# EAGLE board motorshieldv3_jd (EAGLE 5.06)
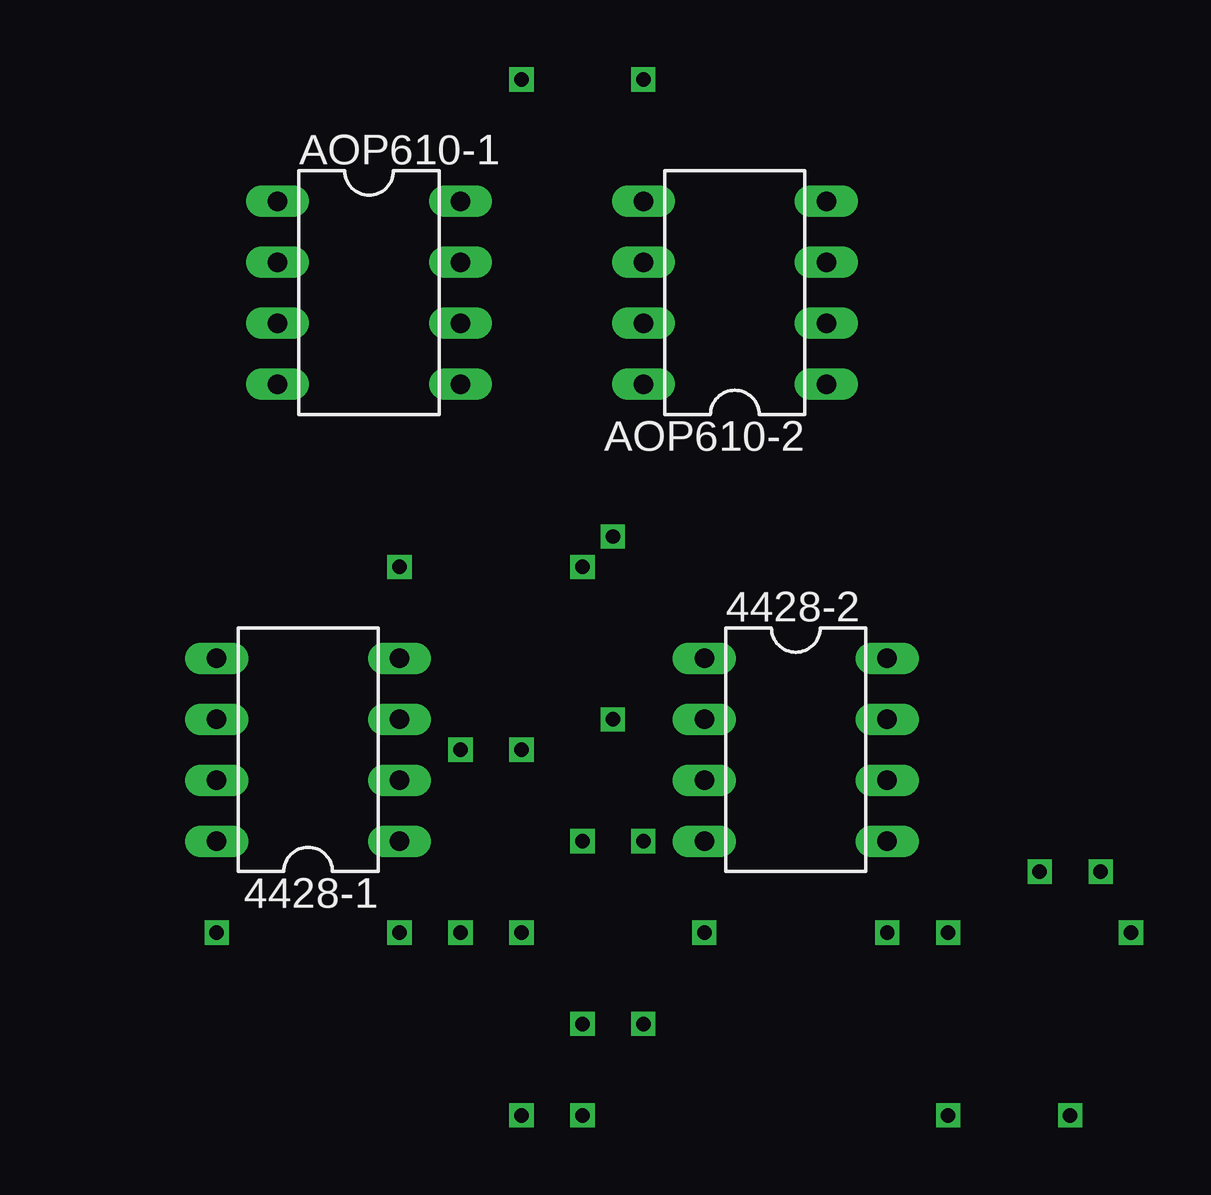
[diagram p0: board, top side]
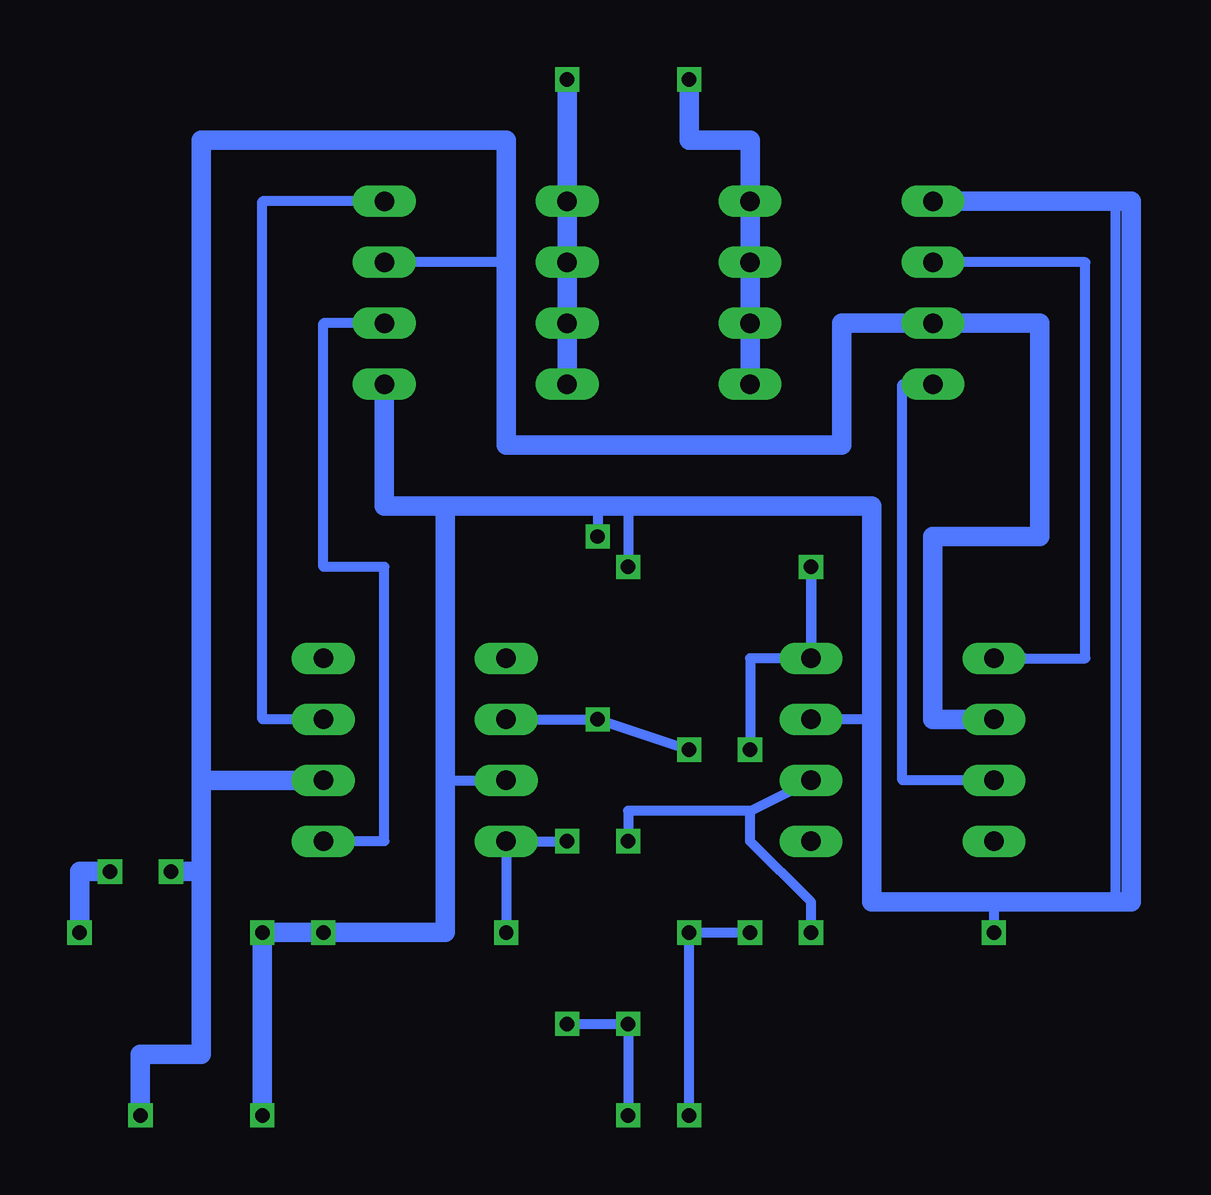
[diagram p1: board, bottom side, seen from below]

No outline drawn. Coordinates in mm, seen from the top.
Copper layers (1*16): Top 0.035mm / dielectric 1.5mm / Bottom 0.035mm
Design rules "default": minimum track width 10mil, minimum drill 24mil, track to track 8mil, track to pad 8mil, pad to pad 8mil, via to via 8mil, smd to smd 8mil, copper to edge 40mil, drill to drill 8mil, minimum pad ring 10mil, minimum via ring 8mil, stop-mask expansion 4mil, vias tented up to drill 0mil, thermal gap 10mil

## Footprints (pad centres in the part's own frame; a part is rotated, then mirrored left to right if it is on the bottom)
DIL08 = drill 0.813 long: 1 -3.81,-3.81; 2 -1.27,-3.81; 3 1.27,-3.81; 4 3.81,-3.81; 5 3.81,3.81; 6 1.27,3.81; 7 -1.27,3.81; 8 -3.81,3.81

## Placement (x,y rotation side)
4428-1  [DIL08]  31.75,41.91 90 top
4428-2  [DIL08]  52.07,41.91 270 top
AOP610-1  [DIL08]  34.29,60.96 270 top
AOP610-2  [DIL08]  49.53,60.96 90 top

## Library data of the parts
4428-1 4428-2 AOP610-1 AOP610-2 = 40xx

## Nets
+VDC: 4428-1.6 4428-2.6 AOP610-1.3 AOP610-2.3
GND: 4428-1.3 4428-2.3 AOP610-1.1 AOP610-2.1
M1: AOP610-1.5 AOP610-1.6
M2: AOP610-2.5 AOP610-2.6 AOP610-2.7 AOP610-2.8
S$1: 4428-1.4
S$2: 4428-2.2
S$3: 4428-1.7 AOP610-1.4
S$4: 4428-2.4
S$11: 4428-1.5 AOP610-1.2
S$12: 4428-2.5 AOP610-2.2
S$13: 4428-2.7 AOP610-2.4
S$14: 4428-1.2
S$15: AOP610-1.7 AOP610-1.8

## Tracks (layer width: path | path; a pad name or v marks a point on that pad's centre or on a via)
+VDC  (via drill 0.6)
  Bottom 0.406: 48.26,62.23 AOP610-2.3 | 48.26,54.61 48.26,62.23 | 48.26,62.23 48.26,67.31
  Bottom 0.813: v63.5,26.67 63.5,29.21 60.96,29.21 60.96,36.83 | 60.96,36.83 60.96,40.64 | 4428-2.6 60.96,40.64 | 60.96,40.64 60.96,67.31 48.26,67.31 48.26,54.61 34.29,54.61 34.29,59.69 AOP610-1.3 26.04,59.69 26.04,50.8 30.48,50.8 30.48,43.18 4428-1.6 | v62.23,36.83 60.96,36.83
GND  (via drill 0.6)
  Bottom 0.406: v58.42,34.29 v55.88,34.29 50.8,34.29 50.8,40.64 | 50.8,40.64 4428-2.3 | 50.8,40.64 50.8,52.07 44.45,52.07 | 44.45,52.07 v44.45,50.8 | 43.18,52.07 44.45,52.07 | 43.18,52.07 v43.18,49.53 | 36.83,52.07 38.1,52.07 | 36.83,52.07 43.18,52.07 | 36.83,52.07 33.02,52.07 33.02,43.18 | 22.86,64.77 22.86,35.56 27.94,35.56 | 27.94,35.56 v27.94,34.29 | 33.02,43.18 4428-1.3 | 33.02,43.18 33.02,35.56 27.94,35.56
  Bottom 0.813: AOP610-1.1 22.23,64.77 22.23,35.56 33.02,35.56 33.02,52.07 51.44,52.07 | 51.44,52.07 53.34,52.07 AOP610-2.1 | 51.44,52.07 50.8,52.07 50.8,34.29 v58.42,34.29 58.42,26.67
M1  (via drill 0.6)
  Bottom 0.406: AOP610-1.5 AOP610-1.6 AOP610-1.5
  Bottom 0.813: AOP610-1.5 38.1,67.31 40.64,67.31 v40.64,69.85
M2
  Bottom 0.406: AOP610-2.6 AOP610-2.5 45.72,67.31 | AOP610-2.7 AOP610-2.8 45.72,67.31 | 45.72,67.31 45.72,69.85
  Bottom 0.813: AOP610-2.8 45.72,69.85
S$1  (via drill 0.6)
  Bottom 0.406: 4428-1.4 v35.56,49.53 4428-1.4 | 4428-1.4 38.1,45.72 v38.1,41.91
S$2  (via drill 0.6)
  Bottom 0.406: 4428-2.2 v44.45,43.18 v40.64,41.91
S$3
  Bottom 0.406: 4428-1.7 31.75,40.64 31.75,57.15 AOP610-1.4
S$4  (via drill 0.6)
  Bottom 0.406: v45.72,38.1 4428-2.4 v48.26,34.29
S$5  (via drill 0.6)
  other vias: 58.42,26.67
S$6  (via drill 0.6)
  Bottom 0.406: v40.64,26.67 v40.64,34.29 v38.1,34.29
S$7  (via drill 0.6)
  other vias: 43.18,26.67
S$8  (via drill 0.6)
  Bottom 0.406: v45.72,30.48 v43.18,30.48 43.18,26.67
S$10  (via drill 0.6)
  other vias: 45.72,69.85
S$11
  Bottom 0.406: 26.67,45.72 4428-1.5 24.13,45.72 24.13,62.23 AOP610-1.2
S$12
  Bottom 0.406: 4428-2.5 53.34,38.1 53.34,49.53 55.88,49.53 55.88,59.69 AOP610-2.2
S$13
  Bottom 0.406: 4428-2.7 58.42,43.18 58.42,64.77 AOP610-2.4
S$14  (via drill 0.6)
  Bottom 0.406: v35.56,34.29 35.56,35.56 38.1,38.1 38.1,39.37 | 38.1,39.37 4428-1.2 | 38.1,39.37 43.18,39.37 v43.18,38.1
S$15
  Bottom 0.406: AOP610-1.7 AOP610-1.8
S$17  (via drill 0.6)
  Bottom 0.813: v64.77,36.83 66.04,36.83 v66.04,34.29